# Altium PCB wiz55stm32.PcbDoc
Units mil, origin at the board's own origin, x right, y up, seen from the top; angles counter-clockwise.
Board outline 3346.46 x 2204.72 mil, 2 copper layers (Top, Bottom); 64 components, 54 nets, 496 pads, 28 vias.
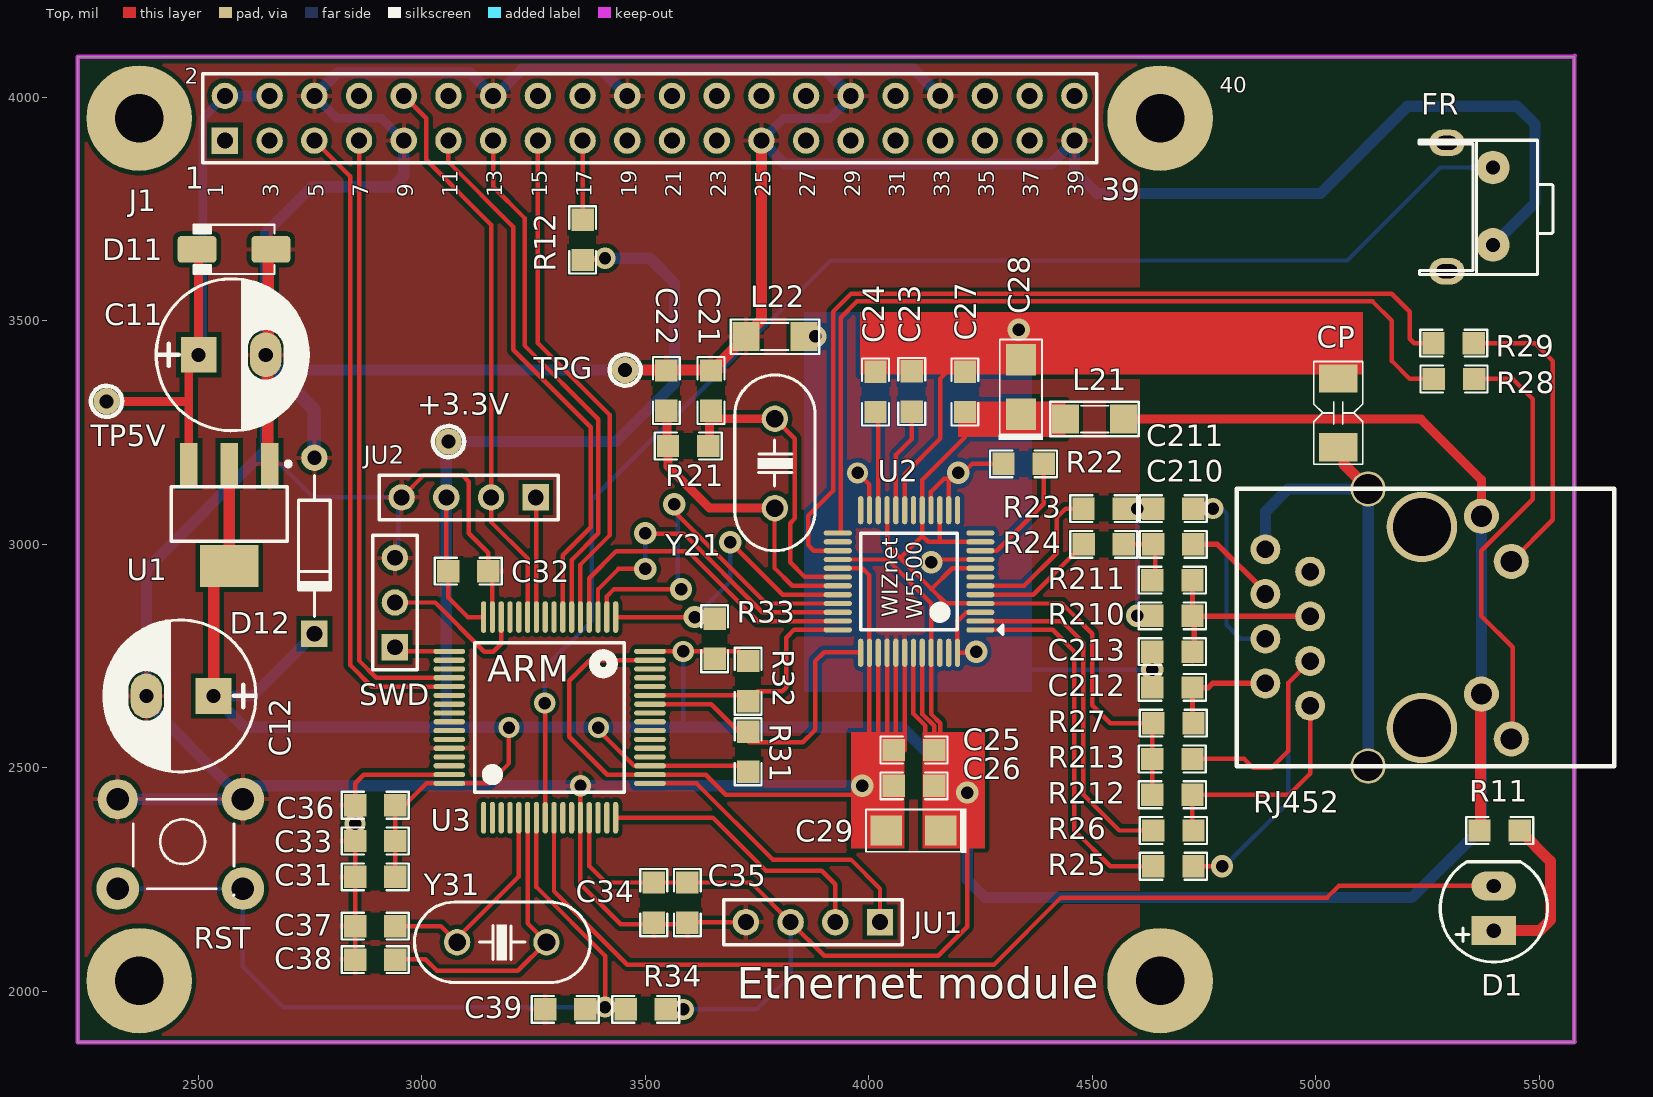
[diagram p0: Top view]
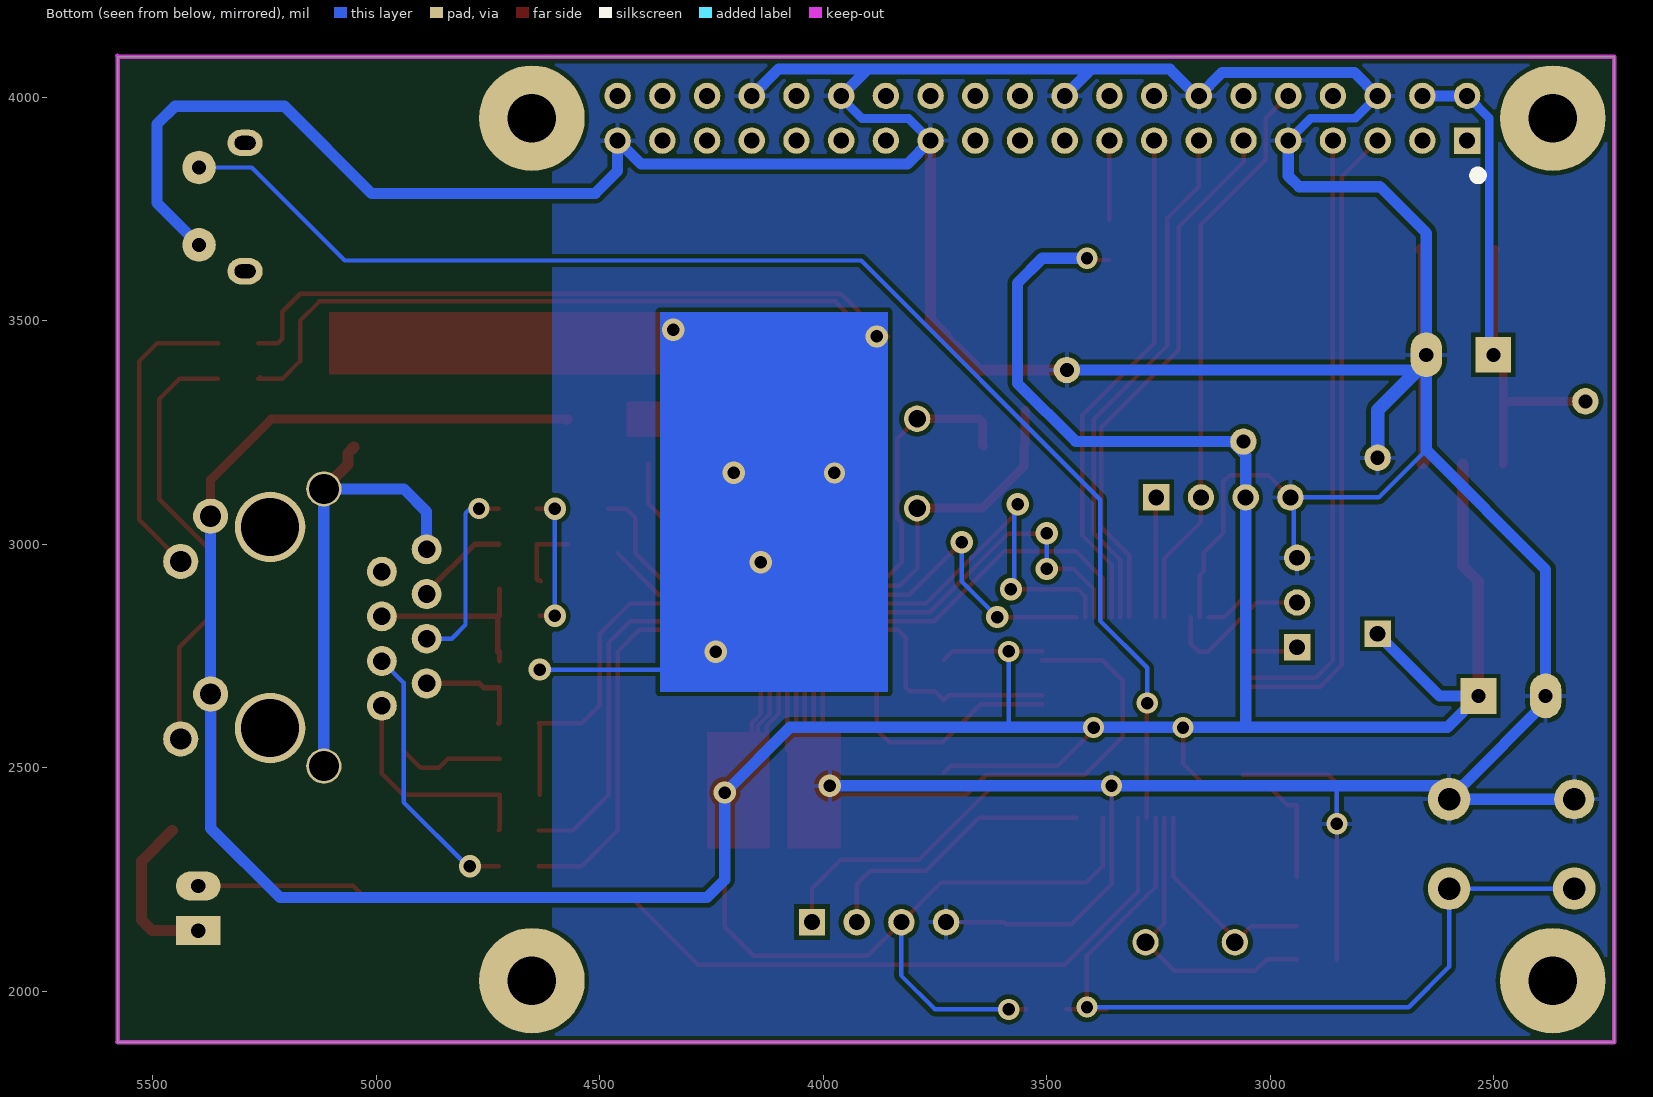
[diagram p1: Bottom view, seen from below]
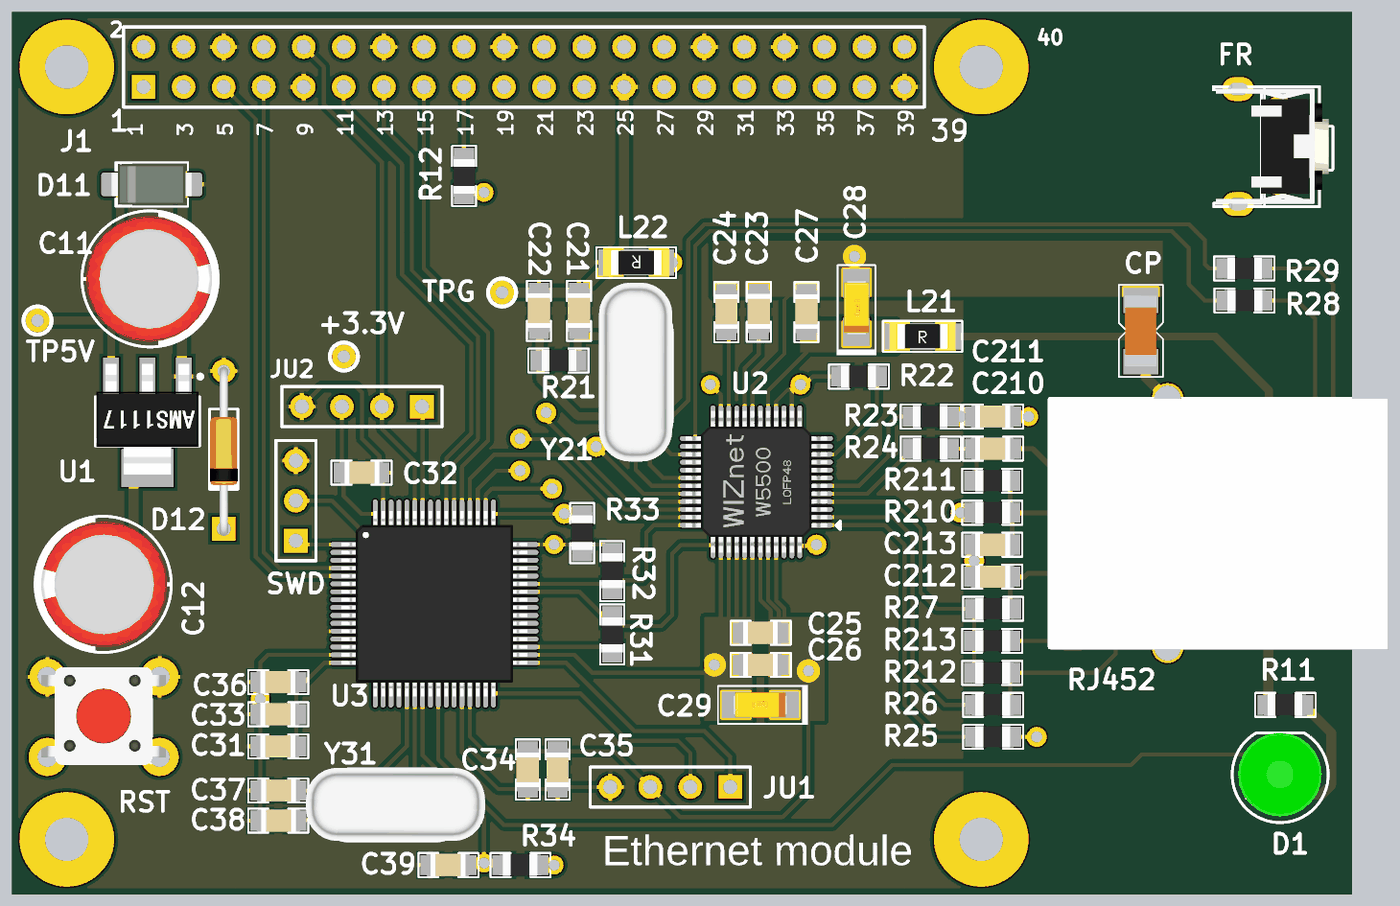
[diagram p2: 3D render of the assembled board from above, using the file's embedded part models]

## Layer stack, top to bottom
Top Solder: solder mask 0.4, Solder Resist, Dk 3.5
Top: signal copper 1.4
Dielectric 1: dielectric 12.6, FR-4, Dk 4.8
Bottom: signal copper 1.4
Bottom Solder: solder mask 0.4, Solder Resist, Dk 3.5

## Board outline
2231.09,1886.15 2231.09,4090.87 5577.55,4090.87 5577.55,1886.15

## Design rules (kind name [scope] priority, off if disabled: settings)
Clearance [All] p1: gap=10 ignorepadtopadclearanceinfootprint=FALSE except(0: Arc-Hole Track-Hole SMDPad-Hole THPad-Hole Via-Hole Fill-Hole Poly-Hole Region-Hole Text-Hole; 7: Arc-Arc Arc-Track Arc-SMDPad Arc-Via Track-Track Track-SMDPad Track-Via SMDPad-SMDPad SMDPad-Via THPad-Via Via-Via)
PolygonConnect [All] p1: connectstyle=Relief reliefconductorwidth=10 reliefentries=4 polygonreliefangle="90 Angle" airgapwidth=10
RoutingVias [All] p1: holewidth=28 width=50 viastyle="Through Hole" minholewidth=23.62 minwidth=43.31 maxholewidth=196.85 maxwidth=196.85
SolderMaskExpansion [All] p1: expansion=4
Width [All] p1: maxlimit=196.85 minlimit=10 preferedwidth=10
30 further rules are at their usual default settings.

## Components (designator, comment, footprint, x,y, rotation, side; value= is the part's Value field where it differs from the comment)
+3.3V "TP" TP2 3060,3230 r0 top
C11 "Cap" "CAP 3.8mm" 2575,3425 r0 top value=100uF
C12 "Cap" "CAP 3.8mm" 2460,2660 r180 top value=100uF
C21 "Tụ điện dán 080518pF" "CAP 0805" 3647,3345 r270 top value=18pF
C22 "Tụ điện dán 080518pF" "CAP 0805" 3547,3345 r270 top value=18pF
C23 "Tụ điện dán 08054.7uF" "CAP 0805" 4096,3343 r270 top value=4.7uF
C24 "Tụ điện dán 080510nF" "CAP 0805" 4015,3342 r270 top value=10nF
C25 "Tụ điện dán 08050.1uF" "CAP 0805" 4100,2540 r0 top value=0.1uF
C26 "Tụ điện dán 08050.1uF" "CAP 0805" 4100,2460 r0 top value=0.1uF
C27 "Tụ điện dán 08050.1uF" "CAP 0805" 4215,3342 r270 top value=0.1uF
C28 "10uF/16V" "CAP-A Size" 4340,3352 r90 top
C29 "10uF/16V" "CAP-A Size" 4100,2360 r180 top
C31 "Tụ điện dán 08050.1uF" "CAP 0805" 2895,2256.5 r0 top value=0.1uF
C32 "Tụ điện dán 08050.1uF" "CAP 0805" 3105,2940 r180 top value=0.1uF
C33 "Tụ điện dán 08050.1uF" "CAP 0805" 2895,2336.5 r0 top value=0.1uF
C34 "Tụ điện dán 08050.1uF" "CAP 0805" 3519,2197.75 r90 top value=0.1uF
C35 "Tụ điện dán 08050.1uF" "CAP 0805" 3594,2197.75 r90 top value=0.1uF
C36 "Tụ điện dán 08050.1uF" "CAP 0805" 2895,2416.5 r0 top value=0.1uF
C37 "Tụ điện dán 080522pF" "CAP 0805" 2897,2146 r180 top value=22pF
C38 "Tụ điện dán 080522pF" "CAP 0805" 2897,2071 r180 top value=22pF
C39 "Tụ điện dán 08050.1uF" "CAP 0805" 3320,1960 r0 top value=0.1uF
C210 "Tụ điện dán 08056.8nF" "CAP 0805" 4680,3000 r0 top value=6.8nF
C211 "Tụ điện dán 08056.8nF" "CAP 0805" 4680,3080 r0 top value=6.8nF
C212 "Tụ điện dán 080522nF" "CAP 0805" 4680,2680 r180 top value=22nF
C213 "Tụ điện dán 080510nF" "CAP 0805" 4680,2760 r180 top value=10nF
CP "1nF/2kV" CAP-1808 5050,3294 r270 top
D1 "Led" "LED 5mm Green" 5398,2186 r90 top
D11 "Đi ốt dánSS14" DO-214AC 2580,3660 r180 top value=SS14
D12 "Đi ốt dánPN:CPDH3V3UP" DO-35 2760,2800 r90 top value=PN:CPDH3V3UP
FR "SW" SW2-D1 5396,3754 r90 top value="SW chip 2 pin"
J1 "Header 20X2" HDR2X20 2559.74,3903.19 r0 top
JU1 "Header 4" HDR1X4 4025,2155 r180 top
JU2 "Header 4" HDR1X4 3255,3105 r180 top
L21 "BLM31KN121BH1L" "SMD 1206" 4505,3280 r0 top
L22 "BLM31KN121BH1L" "SMD 1206" 3790,3465 r180 top
R11 "Điện trở dán 0603560" "RES 0805" 5410,2360 r180 top value=560
R12 "Điện trở dán 08051R" "RES 0805" 3360,3680 r270 top value=1R
R21 "Điện trở dán 08051M" "RES 0805" 3597,3220 r0 top value=1M
R22 "Điện trở dán 080512.4K" "RES 0805" 4345.12,3180 r180 top value=12.4K
R23 "Điện trở dán 080533R" "RES 0805" 4524.25,3080 r180 top value=33R
R24 "Điện trở dán 080533R" "RES 0805" 4524.37,3000 r180 top value=33R
R25 "Điện trở dán 080533R" "RES 0805" 4680.12,2280 r180 top value=33R
R26 "Điện trở dán 080533R" "RES 0805" 4680.12,2360 r180 top value=33R
R27 "Điện trở dán 080510R" "RES 0805" 4680,2600 r180 top value=10R
R28 "Điện trở dán 0805330R" "RES 0805" 5309.88,3370 r0 top value=330R
R29 "Điện trở dán 0805330R" "RES 0805" 5309.25,3449.99 r0 top value=330R
R31 "Điện trở dán 08054.7K" "RES 0805" 3730,2535 r270 top value=4.7K
R32 "Điện trở dán 08054.7K" "RES 0805" 3730,2695.12 r90 top value=4.7K
R33 "Điện trở dán 08054.7K" "RES 0805" 3655,2790 r90 top value=4.7K
R34 "Điện trở dán 08054.7K" "RES 0805" 3500,1960 r180 top value=4.7K
R210 "Điện trở dán 080549.9R" "RES 0805" 4680,2840 r0 top value=49.9R
R211 "Điện trở dán 080549.9R" "RES 0805" 4680,2920 r0 top value=49.9R
R212 "Điện trở dán 080549.9R" "RES 0805" 4680,2440 r0 top value=49.9R
R213 "Điện trở dán 080549.9R" "RES 0805" 4679.88,2520 r0 top value=49.9R
RJ452 "J1B1211CCD" J1B1211CCD 4987,2639 r90 top
RST "Nút bấm 4 chân cắm12x12x6mm" SW 2460,2340 r0 top
SWD "Header 3" HDR1X3 2940,2770 r90 top
TP5V "TP" TP2 2295,3320 r90 top
TPG "TP" TP2 3455,3390 r0 top
U1 "IC nguồn AS1117 dán+3V3" SOT223-4N 2711.45,3234.83 r180 top
U2 "W5500" "WIZnet W5500" 4090,2917 r90 top
U3 "STM32F103RCT6" LQFP64_Tuan 3286,2613 r90 top
Y21 "25MHz" XT2 3790,3181 r270 top
Y31 "8MHz" XT2 3179,2110 r180 top

## Footprints (in the part's own frame and the unit in brackets; to place one, negate y for a bottom-side part, rotate by r counter-clockwise, add the part's x,y. Pads: shape width x height; smd on the part's side, far side on the other; paste and mask are expansions set on the pad)
"CAP 3.8mm" [mil] "16V 470uF"
  rect 80x80 hole 31.5: 1(-74,-1)
  oval 70x100 hole 31.5: 2(76,-1)
  silkscreen extent -169,-171 171,169, body extent -159,-158 156,156, height 446
"CAP 0805" [mm]
  round 0.254 on Mech14: 0(0,0)
  rect 1.27x1.27 smd: 1(-1.118,0) 2(1.168,0)
  rrect25% 1x1.4 on Top Paste: 1(-0.9,0) 1(0.9,0)
  rrect25% 1.2x1.4 on Top Solder: 1(-0.9,0) 1(0.9,0)
  Top pour cut-out: 0.4,-0.8 -0.4,-0.8 -0.4,0.8 0.4,0.8
  silkscreen extent -1.88,-0.76 1.93,0.76, body extent -1.1,-0.73 1.1,0.72, height 1.34
CAP-1808 [mm] "Ceramic CAP 1808(4520)"
  rect 1.6x2.2 smd: 1(-1.95,0) 2(1.95,0)
  silkscreen extent -2.92,-1.4 2.92,1.4, body extent -2.25,-1.02 2.25,1.01, height 2
"CAP-A Size" [mm] "Tantal CAP A Size EIA/IECQ 3216"
  rect 1.8x1.7 smd: 1(-1.55,0) 2(1.55,0)
  silkscreen extent -3,-1.25 2.7,1.25, body extent -1.7,-0.8 1.7,0.8, height 1.75
DO-35 [mm] "1N4148"
  round 1.5 hole 0.8: A(10,0)
  rect 1.5x1.5 hole 0.9: K(0,0)
  silkscreen extent 1,-0.9 9,0.9, body extent -0.43,-0.88 10.27,0.88, height 2.15
DO-214AC [mm] "JEDEC DO214 variation AC. SMA"
  round 0.508 on Mech14: 0(0,0)
  rrect25% 2.2x1.5 smd: A(-2.1,0) K(2.1,0)
  silkscreen extent -2.3,-1.4 2.3,1.4, body extent -2.6,-1.3 2.6,1.3, height 2.42
HDR1X3 [mm] "Connector; Header; 3 Position"
  rect 1.5x1.5 hole 0.9: 1(0,0)
  round 1.5 hole 0.9: 2(2.54,0) 3(5.08,0)
  silkscreen extent -1.27,-1.27 6.35,1.27, body extent -1.27,-1.27 6.35,1.27, height 7
HDR1X4 [mm] "Connector; Header; 4 Position"
  rect 1.5x1.5 hole 0.9: 1(0,0)
  round 1.5 hole 0.9: 2(2.54,0) 3(5.08,0) 4(7.62,0)
  silkscreen extent -1.27,-1.27 8.89,1.27, body extent -1.27,-1.27 8.89,1.27, height 7
HDR2X20 [mm] "Connector; Header; 20x2 Position"
  rect 1.5x1.5 hole 0.9: 1(0,0)
  round 1.5 hole 0.9: 2(0,2.54) 3(2.54,0) 4(2.54,2.54) 5(5.08,0) 6(5.08,2.54) 7(7.62,0) 8(7.62,2.54) 9(10.16,0) 10(10.16,2.54) 11(12.7,0) 12(12.7,2.54) 13(15.24,0) 14(15.24,2.54) 15(17.78,0) 16(17.78,2.54) 17(20.32,0) 18(20.32,2.54) 19(22.86,0) 20(22.86,2.54) 21(25.4,0) 22(25.4,2.54) 23(27.94,0) 24(27.94,2.54) 25(30.48,0) 26(30.48,2.54) 27(33.02,0) 28(33.02,2.54) 29(35.56,0) 30(35.56,2.54) 31(38.1,0) 32(38.1,2.54) 33(40.64,0) 34(40.64,2.54) 35(43.18,0) 36(43.18,2.54) 37(45.72,0) 38(45.72,2.54) 39(48.26,0) 40(48.26,2.54)
  silkscreen extent -1.27,-1.27 49.53,3.81
J1B1211CCD [mm] "BS-R250210"
  round 2 hole 1.2: AG(0.66,-9.73) AY(10.77,-9.73) KG(-1.88,-11.43) KY(8.2,-11.43)
  round 4 hole 3.3: H(-1.27,-6.35) H(10.16,-6.35)
  round 1.7 hole 1: R1(0,0) R2(1.27,2.54) R3(2.54,0) R4(3.81,2.54) R5(5.08,0) R6(6.35,2.54) R7(7.62,0) R8(8.89,2.54)
  round 2 hole 1.7: S1(12.32,-3.3) S2(-3.43,-3.3)
  silkscreen extent -3.43,-17.27 12.32,4.17, body extent -3.56,-17.27 12.32,4.13, height 13.51
"LED 5mm Green" [mil]
  rect 65x100 hole 32: 1(-50,0)
  oval 65x100 hole 32: 2(50,0)
  silkscreen extent -120,-120 104,120, body extent -104,-104 104,105, height 387
LQFP64_Tuan [mm] "Thin QFP, 64-Leads, Body 10x10mm, Pitch 0.5mm, IPC Medium Density"
  oval 1.8x0.3 smd: 1(-5.7,3.75) 2(-5.7,3.25) 3(-5.7,2.75) 4(-5.7,2.25) 5(-5.7,1.75) 6(-5.7,1.25) 7(-5.7,0.75) 8(-5.7,0.25) 9(-5.7,-0.25) 10(-5.7,-0.75) 11(-5.7,-1.25) 12(-5.7,-1.75) 13(-5.7,-2.25) 14(-5.7,-2.75) 15(-5.7,-3.25) 16(-5.7,-3.75) 33(5.7,-3.75) 34(5.7,-3.25) 35(5.7,-2.75) 36(5.7,-2.25) 37(5.7,-1.75) 38(5.7,-1.25) 39(5.7,-0.75) 40(5.7,-0.25) 41(5.7,0.25) 42(5.7,0.75) 43(5.7,1.25) 44(5.7,1.75) 45(5.7,2.25) 46(5.7,2.75) 47(5.7,3.25) 48(5.7,3.75)
  oval 0.3x1.8 smd: 17(-3.75,-5.7) 18(-3.25,-5.7) 19(-2.75,-5.7) 20(-2.25,-5.7) 21(-1.75,-5.7) 22(-1.25,-5.7) 23(-0.75,-5.7) 24(-0.25,-5.7) 25(0.25,-5.7) 26(0.75,-5.7) 27(1.25,-5.7) 28(1.75,-5.7) 29(2.25,-5.7) 30(2.75,-5.7) 31(3.25,-5.7) 32(3.75,-5.7) 49(3.75,5.7) 50(3.25,5.7) 51(2.75,5.7) 52(2.25,5.7) 53(1.75,5.7) 54(1.25,5.7) 55(0.75,5.7) 56(0.25,5.7) 57(-0.25,5.7) 58(-0.75,5.7) 59(-1.25,5.7) 60(-1.75,5.7) 61(-2.25,5.7) 62(-2.75,5.7) 63(-3.25,5.7) 64(-3.75,5.7)
  silkscreen extent -4.25,-4.25 4.25,4.25, body extent -5.89,-5.89 5.89,5.89, height 1.58
"RES 0805" [mm] "Compoment SMD 80x50mil"
  round 0.254 on Mech14: 0(0.003,0)
  rrect25% 0.8x1.3 on Top Paste: 1(-0.997,0) 1(1.003,0)
  rrect25% 1x1.3 on Top Solder: 1(-0.997,0) 1(1.003,0)
  rect 1.27x1.27 smd: 1(1.116,0) 2(-1.17,0)
  Top pour cut-out: 0.603,-0.75 -0.597,-0.75 -0.597,0.75 0.603,0.75
  silkscreen extent -1.93,-0.76 1.88,0.76, body extent -1.1,-0.68 1.1,0.67, height 0.69
"SMD 1206" [mil]
  rect 60x65 smd: 1(-65,0) 2(65,0)
  silkscreen extent -99,-38 99,39, body extent -83,-35 83,36, height 25
SOT223-4N [mm]
  rect 1x2.4 smd: 1(1.307,1.393) 2(3.607,1.393) 3(5.907,1.393)
  rect 3.3x2.4 smd: 4(3.607,7.193)
  silkscreen extent 0.13,1.27 6.91,5.79, body extent 0.36,0.6 6.86,7.59, height 1.87
SW [mil] "6.25x6.25mm"
  round 90 hole 50: 1(-140,90)
  round 95 hole 50: 1(140,90) 2(-140,-110) 2(140,-110)
  silkscreen extent -105,-125 120,90, body extent -156,-130 156,114, height 276
SW2-D1 [mil] "SW button 2pin, 300x 300 x 250 mil"
  round 75 hole 31: 1(-84,0) 2(89,0)
  oval 59.06x78.74 hole 31 slot 47.24 at 90 deg: G1(-143,103) G2(144,103)
  silkscreen extent -150,-134 150,165, body extent -170,-123 172,158, height 291
TP2 [mm]
  round 1.5 hole 0.8: 1(0,0)
  silkscreen extent -0.89,-0.89 0.89,0.89
"WIZnet W5500" [mm]
  oval 0.3x1.6 smd: 1(-2.75,-4.05) 2(-2.25,-4.05) 3(-1.75,-4.05) 4(-1.25,-4.05) 5(-0.75,-4.05) 6(-0.25,-4.05) 7(0.25,-4.05) 8(0.75,-4.05) 9(1.25,-4.05) 10(1.75,-4.05) 11(2.25,-4.05) 12(2.75,-4.05) 25(2.75,4.05) 26(2.25,4.05) 27(1.75,4.05) 28(1.25,4.05) 29(0.75,4.05) 30(0.25,4.05) 31(-0.25,4.05) 32(-0.75,4.05) 33(-1.25,4.05) 34(-1.75,4.05) 35(-2.25,4.05) 36(-2.75,4.05)
  oval 1.6x0.3 smd: 13(4.05,-2.75) 14(4.05,-2.25) 15(4.05,-1.75) 16(4.05,-1.25) 17(4.05,-0.75) 18(4.05,-0.25) 19(4.05,0.25) 20(4.05,0.75) 21(4.05,1.25) 22(4.05,1.75) 23(4.05,2.25) 24(4.05,2.75) 37(-4.05,2.75) 38(-4.05,2.25) 39(-4.05,1.75) 40(-4.05,1.25) 41(-4.05,0.75) 42(-4.05,0.25) 43(-4.05,-0.25) 44(-4.05,-0.75) 45(-4.05,-1.25) 46(-4.05,-1.75) 47(-4.05,-2.25) 48(-4.05,-2.75)
  silkscreen extent -3,-5.32 2.75,2.75, body extent -4.5,-4.5 4.5,4.5, height 1.65
XT2 [mm]
  round 1.5 hole 1: 1(-2.54,0) 2(2.54,0)
  silkscreen extent -5.03,-2.29 4.96,2.29, body extent -5.93,-2.36 5.42,2.29, height 3.5

## Part data
C21 C22 C23 C24 C25 C26 C27 C31 C32 C33 C34 C35 C36 C37 C38 C39 C210 C211 C212 C213: library part "CAP NP", "Capacitor non polarized", cm1="T? di?n dán 0603", cm2="T? di?n dán 0805", cm3="T? di?n dán 1206"
C28 C29: library part "CAP-A Size", "Tantla CAP A Size EIA/IECQ 3216"
CP: library part CAP-1808, "Ceramic CAP 1808(4520)", Capacitance=1nF, Case/Package=1808, Case Code (Metric)=4520, Manufacturer 1=KEMET, Manufacturer Part Number 1=C1808C102MGRACAUTO, Max Operating Temperature=125°C, Min Operating Temperature=-55°C, Ratings=AEC-Q200, Supplier Part Number 1=399-16769-1-ND, Tolerance=20%, Voltage Rating=2kV, Case Code (Imperial)=1808, ComponentLink1Description=https://api.kemet.com/component-edge/download/datasheet/C1808C102MGRACAUTO.pdf?src-supplier=Digi-Key, ComponentLink1URL=https://api.kemet.com/component-edge/download/datasheet/C1808C102MGRACAUTO.pdf?src-supplier=Digi-Key, Mount="Surface Mount", Packaging="Tape and Reel", Pricing 1="1=0.74000, 10=0.52000, 100=0.34230, 500=0.25358 (USD)", RoHS=No, Stock 1=3356, Supplier 1=Digi-Key
D11: library part "Diodes Schottky", "Schottky Diodes Through Hole 3 A 40 V Schottky Diodes, DO-201AD, SB340 ,MBR340", cm1="Ði ?t c?m", cm2="Ði ?t dán"
D12: library part "Diodes Schottky", "Zener 3.3V/1W", cm1="Ði ?t c?m", cm2="Ði ?t dán"
FR: library part SW2, "Switch button 2 pin"
J1: "Header, 20-Pin, Dual row", LatestRevisionDate=17-Jul-2002, LatestRevisionNote="Re-released for DXP Platform.", Publisher="Altium Limited"
JU1 JU2: "Header, 4-Pin", LatestRevisionDate=17-Jul-2002, LatestRevisionNote="Re-released for DXP Platform.", Publisher="Altium Limited"
L21 L22: library part IND-0603, "Ferrite Beads 1206 120ohms 4A AEC-Q200"
R11 R12 R21 R22 R23 R24 R25 R26 R27 R28 R29 R31 R32 R33 R34 R210 R211 R212 R213: library part Res, "Resistor", cm1="Ði?n tr? dán 0603", cm2="Ði?n tr? c?m 1/4W", cm3="Ði?n tr? dán 0805", cm4="Ði?n tr? dán 1206"
RJ452: library part BS-R250210
RST: library part SW-4P-Small, cm1="Nút b?m 4 chân c?m", vl1=12x12x6mm
SWD: "Header, 3-Pin", LatestRevisionDate=17-Jul-2002, LatestRevisionNote="Re-released for DXP Platform.", Publisher="Altium Limited"
U1: library part AS1117, cm="IC ngu?n AS1117 dán", vl=+3V3
U2: "WIZnet W5500"
U3: "ARM Cortex-M3 32-bit MCU, 256 KB Flash, 48 KB Internal RAM, 51 I/Os, 64-pin LQFP, -40 to 85 degC, Tray", I/Os (High Current)=51, Operating Frequency(F) (Processor speed) (MHz)=72, Supplier Part Number 1=497-9033-ND, Supply Voltage(Vcc) min (V)=2, A/D Converter="3x12-bit (16 Channel)", ComponentLink1Description="Manufacturer URL", ComponentLink1URL=http://www.st.com/web/en/home.html, ComponentLink2Description=Datasheet, ComponentLink2URL=http://www.st.com/st-web-ui/static/active/en/resource/technical/document/datasheet/CD00191185.pdf, ComponentLink3Description="Package Specification", ComponentLink3URL=http://www.st.com/st-web-ui/static/active/en/resource/technical/document/datasheet/DM00037051.pdf, Core="ARM Cortex-M3", D/A Converter="2x12-bit (2 Channel)", DatasheetVersion="Rev. 8", FLASH Size (Prog) (kB)=256, Internal RAM Size (kB)=48, Mounting Technology="Surface Mount", PackageDescription="64-Pin Low Profile Quad Flat Package, 10 x 10 mm Body, 0.5 mm Pitch", PackageReference=LQFP64, PackageVersion="Rev. 4, 06/2013", Packing=Tray, PartNumber=STM32F103RCT6, Supplier 1=Digi-Key, Supplier 2=Newark, Supplier 3=Newark, Supplier 4=Mouser, Supplier Part Number 2=01P4099, Supplier Part Number 3=57P1227, Supplier Part Number 4=511-STM32F103RCT6
Y21 Y31: library part Crystal

## Free pads (board coordinates)
  round 236.22 hole 108.27: ""(2368.01,2024.06) ""(2368.01,3953.19) ""(4651.48,2024.06) ""(4651.48,3953.19)

## Via types
v1: diameter 50, hole 28, Top to Bottom, 17 vias
v2: diameter 47.24, hole 27.56, Top to Bottom, 11 vias

## Nets (pads, with @x,y where several pads share a name; then routed paths per layer and width w, separated by ;. In a path a pad name is that pad's centre, name@x,y a point inside that pad or via, vN(x,y) a via of type N, cw(c..) or ccw(c..) an arc to the next point about the centre after c; other vN are vias at no path point)
3.3V_A: C27.2 C28.1 L21.1 R27.1@4636.06,2600 R212.2 R213.2 U2.4 U2.8 U2.11 U2.15 U2.17 U2.21 | length 1936.1
  Top w10: U2.21@4041.13,3076.1 U2.21 4040.79,2999.21 4070.39,2969.61 ; U2.15 4158.9,3006.69 4160,3005.58 ; U2.8 4186.53,2946.53 4140,2900 ; U2.11 4160,3005.58 ; C28.1@4335.98,3295 4334.98,3296 C27.2 4215,3239.57 4119.53,3144.1 U2.17 4119.53,3018.74 ; R212.2 4633.94,2520 4633.94,2597.87 4636.06,2600 4540,2600 4500,2640 4500,2800 4432.21,2867.79 U2.4 4249.1,2868.13 4171.87,2868.13 4140,2900 ; 4070.39,2969.61 4140,2900 ; 4070.39,2969.61 4119.53,3018.74 ; 4119.53,3018.74 4132.68,3005.58 4160,3005.58
+3V3O: J1.17 R12.2 | length 177.2
  Top w10: J1.17 3359.74,3726.32 R12.2
+5V: C11.1 D11.K J1.2 J1.4 TP5V.1 U1.3 | length 1380.2
  Top w20: TP5V.1 2473.9,3320 2478.9,3315 ; U1.3 2478.9,3315 ; D11.K 2501,3656.32 C11.1 2478.9,3401.9 2478.9,3315
  Bottom w20: C11.1 2510.22,3433.22 2510.22,3953.66 J1.2
  Bottom w25: J1.2 J1.4
A3: U3.24
A4: U3.25
ACT_LED: R29.2 U2.27 | length 2056.9
  Top w10: U2.27 3877.1,2985.9 3864,2999 3864,3064 3920,3120 3920,3520 3960.31,3560.31 5169.69,3560.31 5210,3520 5210,3460 5220.01,3449.99 R29.2
AGND: C23.1@4096,3387 C24.1@4015,3386 C27.1@4215,3386 C28.2 C212.2 C213.2 CP.1 L22.1 R22.1@4301.18,3180 U2.3 U2.9 U2.14 U2.16 U2.19 U2.23 U2.48 | length 1511.6
  Top w10: L22.1 v1(3880,3465) ; v2(3975,3160) 4001.42,3133.58 U2.23 ; U2.19 4080.16,3157.16 4160,3237 4160,3371 4175,3386 C27.1@4215,3386 ; U2.16 4138.87,3076.8 4138.87,3117.69 4168.18,3147 4187,3147 v1(4200,3160) 4210.82,3160 4230.82,3180 R22.1@4301.18,3180 ; v1(4140,2960) 4146.21,2966.21 U2.9 ; U2.14 4178.58,3146.42 ; C27.1@4218,3383 C27.1@4215,3386 ; 4220,3466 4220.5,3465.5 4215,3460 C27.1@4215,3386 ; v1(4240,2760) 4237.55,2757.55 U2.48 4198.27,2828.15 4217.87,2847.76 4249.1,2847.76 U2.3 ; v1(4335,3480) 4340,3480 v1@4345,3485
  Bottom w10: 4320,2705 4335,2720 v1(4634,2720)
Check_V1: J1.13 U3.38 | length 1188
  Top w10: J1.13 3159.74,3800.26 3230,3730 3230,3445 3395,3280 3395,3025 3335.21,2965.21 U3.38
Check_V2: J1.15 U3.37 | length 1159.1
  Top w10: J1.15 3259.74,3450.26 3420,3290 3420,3020 3354.9,2954.9 U3.37
EX_OSC_IN: C37.1@2941,2146 U3.5 Y31.2 | length 488.7
  Top w10: C37.1@2941,2146 3043,2146 Y31.2 3079,2119 3217.1,2257.1 U3.5
EX_OSC_OUT: C38.1@2941,2071 U3.6 Y31.1 | length 671.8
  Top w10: C38.1@2941,2071 2942,2072 3008,2072 3034,2046 3215,2046 Y31.1 3236.79,2152.21 U3.6
GND: C11.2 C12.2 C21.1@3647,3389 C22.1@3547,3389 C25.1@4056,2540 C26.1@4056,2460 C29.2 C31.1@2851,2256.5 C32.1@3149,2940 C33.1@2851,2336.5 C34.1@3519,2153.75 C35.1@3594,2153.75 C36.1@2851,2416.5 C37.2 C38.2 C39.1@3276,1960 D11.A D12.A FR.1 J1.6 J1.9 J1.14 J1.20 J1.25 J1.30 J1.34 J1.39 JU1.4 JU2.4 L22.2 RST.1 SWD.3 TPG.1 U1.1 U2.29 U2.38 U2.39 U2.40 U2.41 U2.42 U3.12 U3.18 U3.31 U3.47 U3.60 U3.63 | length 14911.4
  Top w10: C38.2 C37.2 2851,2256.5 2851,2336.5 v2(2851,2375) 2851,2416.5 2851,2466 2870.05,2485.05 U3.63 ; JU2.4 3005,3155 3090,3155 3105,3140 3105,3025 3149,2981 3149,2940 3158.05,2930.95 U3.47 ; v2(3355,2460) 3355,2455 3354.9,2454.9 U3.12 3354.9,2240.1 3445,2150 3590.25,2150 3594,2153.75 3595.25,2155 JU1.4 ; U3.31@3510.76,2740.61 U3.31 3375.95,2740.95 3330,2695 3330,2570 3415,2485 U3.18 U3.18 3634.95,2485.05 3680,2440 3970,2440 3980,2430 ; U2.29 3985.47,2946.53 4001.42,2930.58 U2.38 4001.42,2561.42 4000,2560 ; 4020,2560 4021.1,2561.1 U2.39 ; U2.40 4040.79,2555.21 C25.1@4056,2540 ; 4060.47,2580 U2.41 ; C25.1@4080.16,2540 U2.42
  Top w25: U1.1 2655.5,3184.5 2655.5,3419.5 C11.2 2656.84,3429.84 2656.84,3654.16 D11.A ; TPG.1 3650,3390 3705,3445 3707.5,3445 3725,3462.5 L22.2 3725,3467.5 3759.74,3502.24 J1.25
  Bottom w10: 2651,3211 2757,3105 JU2.4 2947.5,3097.5 2947.5,2977.5 SWD.3 ; v2(2851,2375) 2851,2456 2855,2460
  Bottom w20: J1.6 2809.74,3953.19 2909.74,3953.19 J1.9 ; J1.25 3809.27,3952.72 3913.28,3952.72 3959.74,3999.18 J1.30
  Bottom w25: RST.1@2320,2430 2600,2430 RST.1@2570,2460 ; C11.2@2651,3409 2651,3211 2384,2944 C12.2 2384,2646 RST.1@2570,2460 ; C11.2 2651,3696 2755,3800 2935.36,3800 2959.74,3824.39 J1.9 ; 2685,3390 TPG.1 ; J1.6 2811.77,4055.22 3107.72,4055.22 J1.14 3164.82,4003.19 3225,4063.37 3399.56,4063.37 ; J1.20 3399.56,4063.37 ; J1.25 3811.77,3851.16 4407.72,3851.16 J1.39 4459.74,3835.26 4510,3785 5010,3785 5205,3980 5450,3980 5490,3940 5490,3764 FR.1 ; J1.30 3899.56,4063.37 ; v1(3985,2460) v2(3355,2460) 2855,2460 RST.1@2570,2460 ; J1.34 4099.56,4063.37 3899.56,4063.37 ; 3399.56,4063.37 3899.56,4063.37
  Bottom w30: C11.2 2651,3409 2760,3300 D12.A
GPIO1_3V: J1.5 U3.53 | length 1447.9
  Top w10: J1.5 2840,3822.94 2840,2730 2888.1,2681.9 U3.53
GPIO2_3V: J1.7 U3.52 | length 1380.8
  Top w10: J1.7 2859.74,2740.26 2898.42,2701.58 U3.52
GPIO3_3V: J1.11 U3.39 | length 1223.5
  Top w10: J1.11 3059.74,3855.26 3205,3710 3205,3435 3378,3262 3378,3038 3315.53,2975.53 U3.39
INTn: R32.2 U2.36 U3.27 | length 555
  Top w10: U3.27 3718.97,2662.21 3730,2651.18 3750,2671.18 3806.18,2671.18 3815,2680 3815,2791 3832.73,2808.73 U2.36
LED: U3.44
LINK_LED: R28.2 U2.25 | length 1959.7
  Top w10: U2.25 3936.16,3025.27 3937,3026.1 3937,3507 3973.31,3543.31 5126.69,3543.31 5170,3500 5170,3410 5210,3370 R28.2 R28.2@5259.82,3374
MISO: U2.34 U3.35 | length 770.4
  Top w10: U3.35 3394.27,2899.27 3440,2945 v1(3500,2945) ; v1(3500,3025) 3500.78,3024.22 3585.78,3024.22 3761.9,2848.1 U2.34
  Bottom w10: v1(3500,2945) v1(3500,3025)
MOSI: U2.35 U3.36 | length 733
  Top w10: U3.36 3374.58,2924.58 3435,2985 3595,2985 3751.58,2828.42 U2.35
NetC23_2: C23.2 U2.20 | length 235.3
  Top w10: U2.20 4060.47,3200.04 4096,3235.57 C23.2
NetC24_2: C24.2 U2.22 | length 222.1
  Top w10: C24.2 4021.1,3289.9 U2.22
NetC210_1: C210.1@4636,3000 R24.2 R211.2 | length 153.5
  Top w10: R24.2 4640.25,3000 4640.25,2922.06 R211.2@4638.19,2920 ; R211.2@4631.94,2918 R211.2
NetC211_1: C211.1@4636,3080 R23.2 R210.2 | length 315.7
  Top w10: v1(4600,2840) R210.2 R210.2@4633.87,2839.94 ; v1(4600,3080) C211.1@4636,3080 ; C211.1@4635,3079 C211.1@4636,3080 ; C211.1@4640.25,3080 C211.1@4636,3080
  Bottom w10: v1(4600,2840) v1(4600,3080)
NetCP_2: CP.2 RJ452.R8 RJ452.S1 RJ452.S2 | length 1076
  Top w25: CP.2 5062.57,3204.66 5062.57,3178.39 RJ452.S1
  Bottom w25: RJ452.R8 4887,3073 4938.04,3124.04 RJ452.S1 RJ452.S2
NetD1_A: D1.1 R11.2 | length 365.5
  Top w25: D1.1 5501,2136 5525,2160 5525,2291.06 R11.2
NetR22_2: R22.2 U2.10 | length 274.7
  Top w10: U2.10@4249.1,2986.24 U2.10 4285.9,2985.9 4391.18,3091.18 R22.2
NetR28_1: R28.1@5353.82,3370 RJ452.KG | length 987.7
  Top w10: R28.1@5353.82,3370 5440,3370 5485,3325 5485,3101.05 5370,2986.05 5370,2840 5440,2770 5440,2567.98 RJ452.KG
NetR29_1: R29.1@5353.19,3449.99 RJ452.KY | length 680.1
  Top w10: R29.1@5353.19,3449.99 5490.01,3449.99 5530,3410 5530,3054.83 RJ452.KY
PC0: FR.2 U3.8 | length 3079.1
  Top w10: v2(3275,2645) 3275,2635 3276.16,2633.84 U3.8
  Bottom w10: v2(3275,2645) 3275,2723.82 3380,2828.82 3380,3100 3915,3635 5070,3635 5278,3843 FR.2
PC1: D1.2 U3.9 | length 2407.5
  Top w10: U3.9 3295.84,2224.16 3460,2060 4280,2060 4430,2210 5025,2210 5051,2236 D1.2
RC: C213.1@4724,2760 R210.1@4723.94,2840 R211.1@4723.94,2920 RJ452.R5 | length 419.3
  Top w12: C213.1@4723.94,2760 4723.94,2740.06 C213.1@4724,2740 ; R210.1@4723.94,2840 R211.1@4723.94,2900 ; C213.1@4728.19,2760 4728.19,2840 4729.19,2839 RJ452.R5
RD+: C211.2 RJ452.R4 | length 428
  Top w10: C211.2 v2(4770,3080)
  Bottom w10: v2(4770,3080) 4790,3080 4800,3070 4800,2820 4831,2789 RJ452.R4
RD-: C210.2 RJ452.R6 | length 220.1
  Top w12: C210.2 4780,3000 4887,2893 RJ452.R6 RJ452.R6@4876.22,2889
RSTn: R31.2 U2.37 U3.26 | length 681.4
  Top w10: U3.26 3647.47,2642.53 3732.81,2557.19 3852.19,2557.19 3880,2585 3880,2739 3900,2759 3980.9,2759 3981.73,2758.16 U2.37
RX2: JU1.1 U3.17 | length 687.1
  Top w10: U3.17 3614.64,2465.36 3785,2295 3960,2295 4025,2230 JU1.1
RXN: R24.1@4480.43,3000 U2.5 | length 248.9
  Top w10: U2.5 4367.47,2887.47 R24.1@4460,2980
RXP: R23.1@4480.31,3080 U2.6 | length 349.3
  Top w10: U2.6 4347.16,2907.16 4420,2980 4420,3060 4440,3080 R23.1@4480.31,3080
SCLK: U2.33 U3.34 | length 882.8
  Top w10: U3.34 3414.3,2837.76 3414.3,2884.3 3430,2900 v1(3580,2900) ; v1(3565,3090) 3565,3073.43 3770.64,2867.79 U2.33
  Bottom w10: v1(3565,3090) 3572.5,3082.5 3572.5,2907.5 v1(3580,2900)
SCSn: R33.1@3655,2833.94 U2.32 U3.33 | length 666.6
  Top w10: U3.33 v1(3610.41,2837.41) ; v1(3690,3005) 3807.53,2887.47 U2.32
  Bottom w10: v1(3610.41,2837.41) 3690,2917 v1(3690,3005)
STMRST: C39.2 R34.1@3456.06,1960 RST.2 U3.7 | length 1879.5
  Top w10: U3.7 3256.47,2233.53 3410,2080 v2(3410,1965) ; C39.2 R34.1@3456.06,1960
  Bottom w10: RST.2@2320,2230 2600,2230 2600,2055 2690,1965 v2(3410,1965)
SWCLK: SWD.1 U3.49 | length 125.5
  Top w10: SWD.1 2949.36,2760.64 U3.49
SWDIO: SWD.2 U3.46 | length 350.3
  Top w10: SWD.2 3030,2870 3140,2760 3160,2760 3177.73,2777.73 U3.46
TC: C212.1@4724,2680 R27.2 RJ452.R2 | length 248
  Top w12: R27.2 4724,2602.06 4724,2680 4724.5,2679.5 4759.5,2679.5 4769,2689 RJ452.R2
TD+: R26.2 R212.1@4723.94,2440 RJ452.R1 | length 515.5
  Top w10: R26.2 4723.94,2362.24 4723.94,2440 4940,2440 4987,2487 RJ452.R1
TD-: R25.2 R213.1@4723.82,2520 RJ452.R3 | length 1066.8
  Top w10: R213.1@4723.82,2520 4840,2520 4860,2500 4900,2500 4938.05,2538.05 4938.05,2690.05 RJ452.R3 ; R25.2 v1(4790,2280)
  Bottom w10: v1(4790,2280) 4795,2280 4938.54,2423.54 4938.54,2690.54 RJ452.R3
To_RX_RAS: J1.10 JU2.2 U3.43 | length 1280.5
  Top w10: J1.10 3010,3952.94 3010,3860 3155,3715 JU2.2 3155,3050 3236.79,2968.21 U3.43
TX1: JU2.1 U3.42 | length 268.2
  Top w10: JU2.1 3256.47,3103.53 U3.42
TX2: JU1.2 U3.16 | length 637.9
  Top w10: U3.16 3651.41,2388.59 3770,2270 3895,2270 3925,2240 JU1.2
TXN: R25.1@4636.18,2280 U2.1 | length 840.1
  Top w10: U2.1 4411.27,2808.73 4460,2760 4460,2360 4540,2280 R25.1@4636.18,2280
TXP: R26.1@4636.18,2360 U2.2 | length 779.9
  Top w10: U2.2 4431.58,2828.42 4480,2780 4480,2440 4560,2360 R26.1@4636.18,2360
VCC: +3.3V.1 C12.1 C25.2 C26.2 C29.1 C31.2 C32.2 C33.2 C34.2 C35.2 C36.2 D12.K JU1.3 JU2.3 L21.2 R11.1@5366.06,2360 R12.1@3360,3636.06 R31.1@3730,2491.06 R32.1@3730,2739.06 R33.2 R34.2 RJ452.AG RJ452.AY U1.2 U1.4 U2.28 U2.43 U2.44 U2.45 U3.13 U3.19 U3.32 U3.48 U3.64 | length 12092.6
  Top w10: C31.2 C33.2 C36.2 2961.5,2416.5 3010.36,2465.36 U3.64 3150.36,2465.36 3195,2510 v2(3195,2590) ; JU2.3 3055,2944 C32.2 3059,2881 3102.59,2837.41 U3.48 ; R12.1@3360,3636.06 3406.06,3636.06 v2(3410,3640) ; U3.13 3374.58,2280.42 3411.25,2243.75 C34.2 C35.2 3736.25,2243.75 JU1.3 3900,2080 4155,2080 4220,2145 v1(4220,2445) ; v2(3395,2590) 3395,2584.98 3474.9,2505.08 3510.06,2505.08 U3.19 3714.2,2504.73 R31.1@3730,2488.94 ; U3.32 v2(3585,2760.64) 3710.54,2760.64 R32.1@3730,2741.18 ; R34.2 v2(3585,1960) ; U2.28 4041.66,2966.21 4139.21,2868.66 U2.45 4139.21,2620.79 4160,2600 4160,2554 C25.2 ; U2.43 4099.84,2621 4126,2594.84 4126,2560 C25.2 ; U2.44 4119.53,2620.47 4146,2594 C25.2
  Top w20: L21.2@4573,3277 L21.2 5235,3280 5370.07,3144.93 RJ452.AY
  Top w25: C12.1 2534.7,2661.7 2534.7,2916.91 U1.4 U1.2 ; R11.1@5366.06,2360 5368.07,2362 5368.07,2662.98 RJ452.AG
  Bottom w10: v2(3585,1960) 3750,1960 3825.86,2035.86 3825.86,2044.14 3825,2045 JU1.3 ; 3585,2590 3585,2591 v2(3585,2760.64)
  Bottom w25: D12.K 2621,2661 C12.1 2604,2591 3050,2591 ; v2(3410,3640) 3510,3640 3565,3585 3565,3360 3435,3230 3085,3230 3055,3200 JU2.3 3055,2596 3050,2591 ; RJ452.AY RJ452.AG 5370.07,2365.07 5215,2210 4260,2210 4220,2250 v1(4220,2445) 4074,2591 3585,2591 3050,2591
XI: C21.2 R21.1@3640.94,3220 U2.30 Y21.1 | length 667.7
  Top w10: Y21.1 3834.53,3236.47 3834.53,3058.08 3824,3047.55 3824,2960 3856.81,2927.19 3930.2,2927.19 U2.30
  Top w20: R21.1@3640.94,3220 3643.97,3223.03 3643.97,3273 3651.97,3281 Y21.1
XO: C22.2 R21.2 U2.31 Y21.2 | length 696.6
  Top w10: Y21.2 3789,3080 3789,2947 3828.84,2907.16 U2.31
  Top w20: C22.2 3548.97,3297.03 3548.97,3221.97 R21.2 3550.94,3174.06 3644,3081 Y21.2
pads on no net: C21.0 C21.1@3647,3309.57 C21.1@3647,3380.43 C21.1@3647.01,3309.56 C21.1@3647.01,3380.43 C22.0 C22.1@3547,3309.57 C22.1@3547,3380.43 C22.1@3547.01,3309.56 C22.1@3547.01,3380.43 C23.0 C23.1@4096,3307.57 C23.1@4096,3378.43 C23.1@4096.01,3307.56 C23.1@4096.01,3378.43 C24.0 C24.1@4015,3306.57 C24.1@4015,3377.43 C24.1@4015.01,3306.56 C24.1@4015.01,3377.43 C25.0 C25.1@4064.57,2540 C25.1@4064.57,2540.01 C25.1@4135.43,2540 C25.1@4135.44,2540.01 C26.0 C26.1@4064.57,2460 C26.1@4064.57,2460.01 C26.1@4135.43,2460 C26.1@4135.44,2460.01 C27.0 C27.1@4215,3306.57 C27.1@4215,3377.43 C27.1@4215.01,3306.56 C27.1@4215.01,3377.43 C31.0 C31.1@2859.57,2256.5 C31.1@2930.43,2256.5 C31.1@2930.44,2256.5 C32.0 C32.1@3069.56,2939.99 C32.1@3069.57,2940 C32.1@3140.43,2939.99 C32.1@3140.43,2940 C33.0 C33.1@2859.57,2336.5 C33.1@2930.43,2336.5 C33.1@2930.44,2336.5 C34.0 C34.1@3518.99,2162.32 C34.1@3518.99,2233.18 C34.1@3519,2162.31 C34.1@3519,2233.18 C35.0 C35.1@3593.99,2162.32 C35.1@3593.99,2233.18 C35.1@3594,2162.31 C35.1@3594,2233.18 C36.0 C36.1@2859.57,2416.5 C36.1@2930.43,2416.5 C36.1@2930.44,2416.5 C37.0 C37.1@2861.56,2145.99 C37.1@2861.57,2146 C37.1@2932.43,2145.99 C37.1@2932.43,2146 C38.0 C38.1@2861.56,2070.99 C38.1@2861.57,2071 C38.1@2932.43,2070.99 C38.1@2932.43,2071 C39.0 C39.1@3284.57,1960 C39.1@3284.57,1960.01 C39.1@3355.43,1960 C39.1@3355.44,1960.01 C210.0 C210.1@4644.57,3000 C210.1@4644.57,3000.01 C210.1@4715.43,3000 C210.1@4715.44,3000.01 C211.0 C211.1@4644.57,3080 C211.1@4644.57,3080.01 C211.1@4715.43,3080 C211.1@4715.44,3080.01 C212.0 C212.1@4644.56,2679.99 C212.1@4644.57,2680 C212.1@4715.43,2679.99 C212.1@4715.43,2680 C213.0 C213.1@4644.56,2759.99 C213.1@4644.57,2760 C213.1@4715.43,2759.99 C213.1@4715.43,2760 D11.0 FR.G1 FR.G2 J1.1 J1.3 J1.8 J1.12 J1.16 J1.18 J1.19 J1.21 J1.22 J1.23 J1.24 J1.26 J1.27 J1.28 J1.29 J1.31 J1.32 J1.33 J1.35 J1.36 J1.37 J1.38 J1.40 R11.0 R11.1@5370.51,2359.99 R11.1@5370.51,2360 R11.1@5449.25,2359.99 R11.1@5449.25,2360 R12.0 R12.1@3360,3640.51 R12.1@3360,3719.25 R12.1@3360.01,3640.51 R12.1@3360.01,3719.25 R21.0 R21.1@3557.75,3220 R21.1@3557.75,3220.01 R21.1@3636.49,3220 R21.1@3636.49,3220.01 R22.0 R22.1@4305.63,3179.99 R22.1@4305.63,3180 R22.1@4384.37,3179.99 R22.1@4384.37,3180 R23.0 R23.1@4484.76,3079.99 R23.1@4484.76,3080 R23.1@4563.5,3079.99 R23.1@4563.5,3080 R24.0 R24.1@4484.88,2999.99 R24.1@4484.88,3000 R24.1@4563.62,2999.99 R24.1@4563.62,3000 R25.0 R25.1@4640.63,2279.99 R25.1@4640.63,2280 R25.1@4719.37,2279.99 R25.1@4719.37,2280 R26.0 R26.1@4640.63,2359.99 R26.1@4640.63,2360 R26.1@4719.37,2359.99 R26.1@4719.37,2360 R27.0 R27.1@4640.51,2599.99 R27.1@4640.51,2600 R27.1@4719.25,2599.99 R27.1@4719.25,2600 R28.0 R28.1@5270.63,3370 R28.1@5270.63,3370.01 R28.1@5349.37,3370 R28.1@5349.37,3370.01 R29.0 R29.1@5270,3449.99 R29.1@5270,3450 R29.1@5348.74,3449.99 R29.1@5348.74,3450 R31.0 R31.1@3730,2495.51 R31.1@3730,2574.25 R31.1@3730.01,2495.51 R31.1@3730.01,2574.25 R32.0 R32.1@3729.99,2655.87 R32.1@3729.99,2734.61 R32.1@3730,2655.87 R32.1@3730,2734.61 R33.0 R33.1@3654.99,2750.75 R33.1@3654.99,2829.49 R33.1@3655,2750.75 R33.1@3655,2829.49 R34.0 R34.1@3460.51,1959.99 R34.1@3460.51,1960 R34.1@3539.25,1959.99 R34.1@3539.25,1960 R210.0 R210.1@4640.75,2840 R210.1@4640.75,2840.01 R210.1@4719.49,2840 R210.1@4719.49,2840.01 R211.0 R211.1@4640.75,2920 R211.1@4640.75,2920.01 R211.1@4719.49,2920 R211.1@4719.49,2920.01 R212.0 R212.1@4640.75,2440 R212.1@4640.75,2440.01 R212.1@4719.49,2440 R212.1@4719.49,2440.01 R213.0 R213.1@4640.63,2520 R213.1@4640.63,2520.01 R213.1@4719.37,2520 R213.1@4719.37,2520.01 RJ452.H RJ452.R7 U2.7 U2.12 U2.13 U2.18 U2.24 U2.26 U2.46 U2.47 U3.1 U3.2 U3.3 U3.4 U3.10 U3.11 U3.14 U3.15 U3.20 U3.21 U3.22 U3.23 U3.28 U3.29 U3.30 U3.40 U3.41 U3.45 U3.50 U3.51 U3.54 U3.55 U3.56 U3.57 U3.58 U3.59 U3.61 U3.62

## Polygon pours and split planes (outlines as drawn)
GND on Top "Top-GND" (solid, pour order 4): 2244.09,1889.76 4606.3,1889.76 4606.3,4094.49 2244.09,4094.49
GND on Top "Top-GND 1" (solid, pour order 2): 2368.01,2024.06
GND on Bottom "Bottom-GND" (solid, pour order 6): 2244.09,1889.76 4606.3,1889.76 4606.3,4094.49 2244.09,4094.49

## Keep-outs
Keep-Out Layer:
  lines w10: 5576.8,1885.96 5578.61,1887.77 ; 5577.21,4091.02 5578.61,4092.42 ; 2231.09,1886.15 5577.55,1886.15 5577.55,4090.87 2231.09,4090.87 2231.09,1886.15

## Other copper
Top:
  rectangle net 3.3V_A: 4200,3240 4440,3320
  rectangle net AGND: 3980,3380 5105,3520
  rectangle net GND: 3960,2320 4080,2580
  rectangle net VCC: 4120,2320 4260,2580
Bottom:
  rectangle net AGND: 3855,2670 4365,3520

## Silkscreen, mask and mechanical layers (free items; w line width, h text height)
Top Overlay:
  text "1" at 2555.61,3776.81 h35 r90
  text "3" at 2680.61,3776.81 h35 r90
  text "5" at 2780.61,3776.81 h35 r90
  text "7" at 2880.61,3776.81 h35 r90
  text "9" at 2980.61,3776.81 h35 r90
  text "11" at 3080.61,3776.81 h35 r90
  text "13" at 3180.61,3776.81 h35 r90
  text "15" at 3280.61,3776.81 h35 r90
  text "17" at 3380.61,3776.81 h35 r90
  text "19" at 3480.61,3776.81 h35 r90
  text "21" at 3580.61,3776.81 h35 r90
  text "23" at 3680.61,3776.81 h35 r90
  text "25" at 3780.61,3776.81 h35 r90
  text "27" at 3880.61,3776.81 h35 r90
  text "29" at 3980.61,3776.81 h35 r90
  text "31" at 4080.61,3776.81 h35 r90
  text "33" at 4180.61,3776.81 h35 r90
  text "35" at 4280.61,3776.81 h35 r90
  text "37" at 4380.61,3776.81 h35 r90
  text "39" at 4480.61,3776.81 h35 r90
  text "Ethernet module" at 3705,1960 h120
Bottom Overlay:
  circle w19.68: c2535.33,3825.24 r9.84
Mechanical 2:
  lines w10: 5438.82,1886.1 ccw(c5438.82,2023.9) 5576.62,2024.06 5576.62,3953.19 ; 5438.82,4090.99 2368.01,4090.99 ccw(c2368.01,3953.19) 2230.22,3953.19 2230.22,2024.06 ccw(c2368.01,2024.06) 2368.01,1886.26 5438.88,1886.26 ; 5438.82,4091.14 cw(c5438.82,3953.35) 5576.62,3953.35

## Text inside footprints (layer, text, board x,y; h text height)
J1: Top Overlay "39" at 4520,3770 h50; Top Overlay "40" at 4785,4010 h35; Top Overlay "2" at 2470,4030 h35; Top Overlay "1" at 2470,3795 h50
U2: Top Overlay "WIZnet" at 4065,2837 h36 r90
U3: Top Overlay "ARM" at 3146,2693 h60